# Altium PCB BYS_PCB1.PcbDoc
Units mm, origin at the board's own origin, x right, y up, seen from the top; angles counter-clockwise.
Board outline 97 x 73.5 mm, 2 copper layers (Top Layer, Bottom Layer), stack 1.571 mm thick; 34 components, 38 nets, 170 pads, 358 vias.
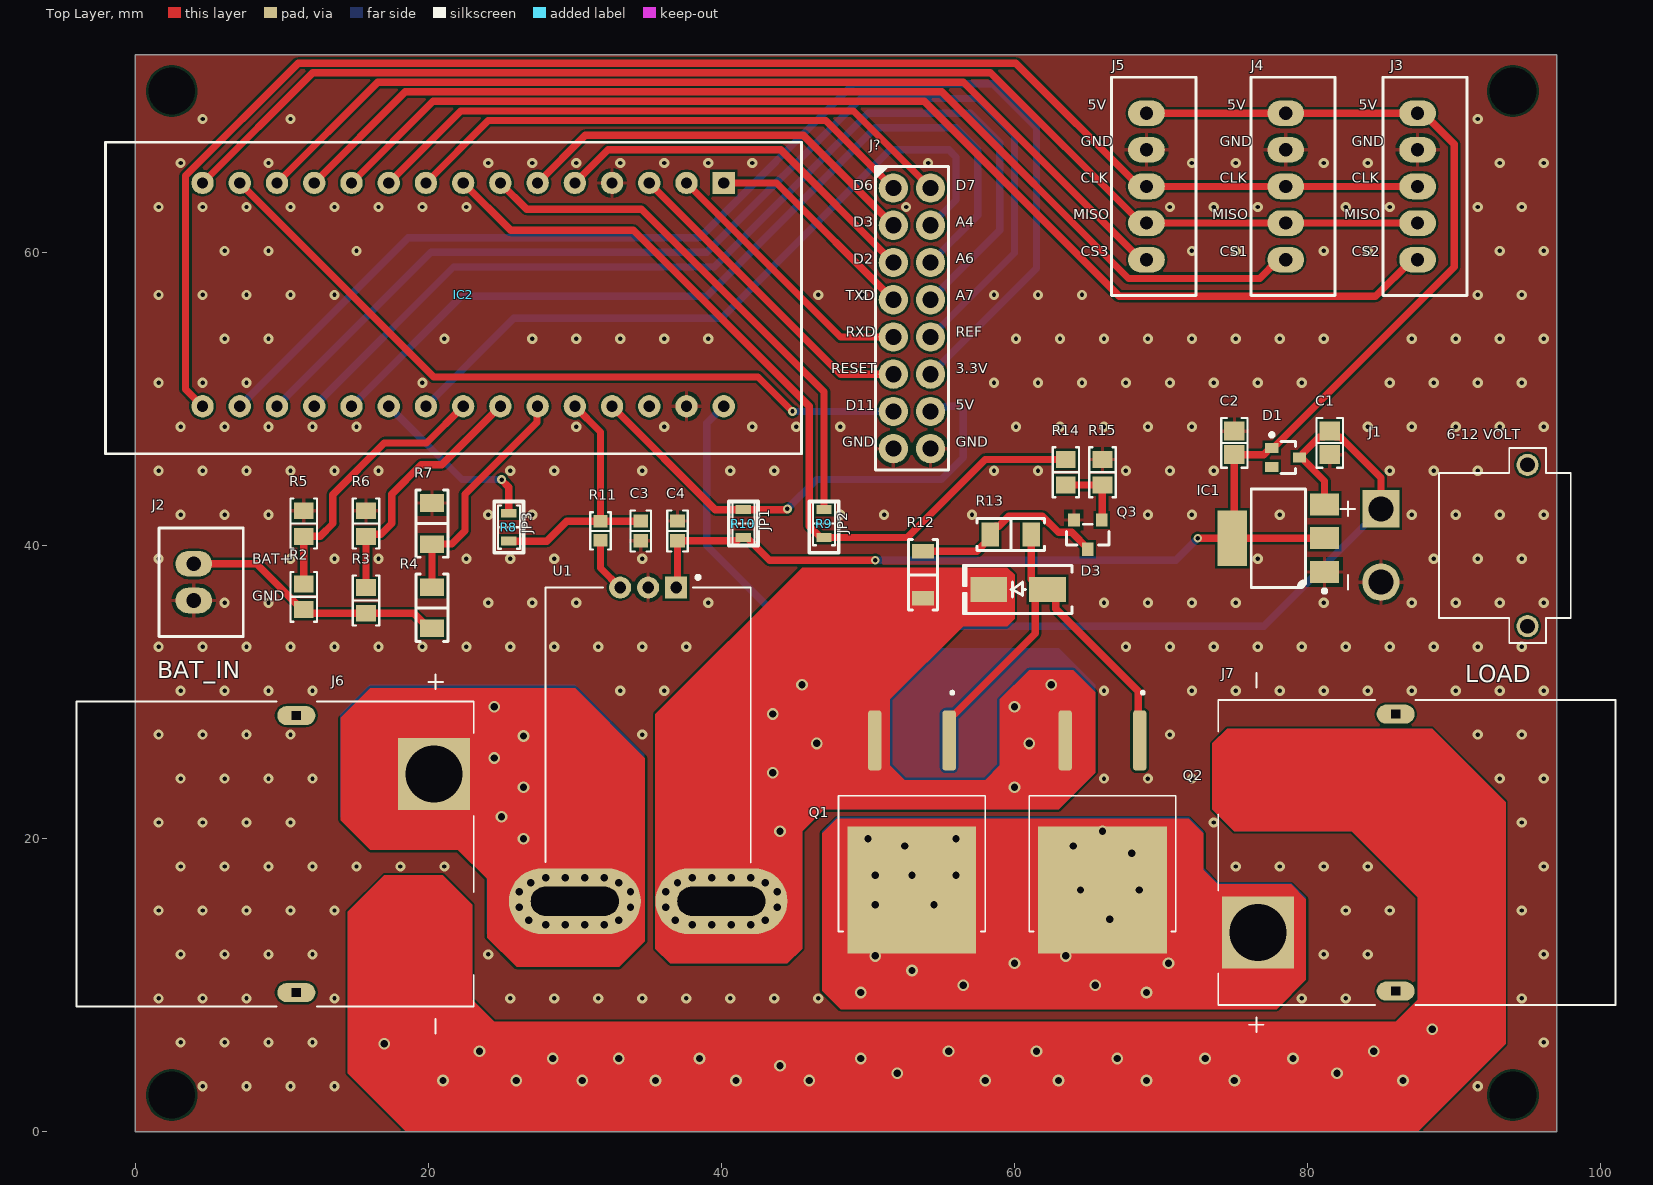
[diagram p0: Top Layer view]
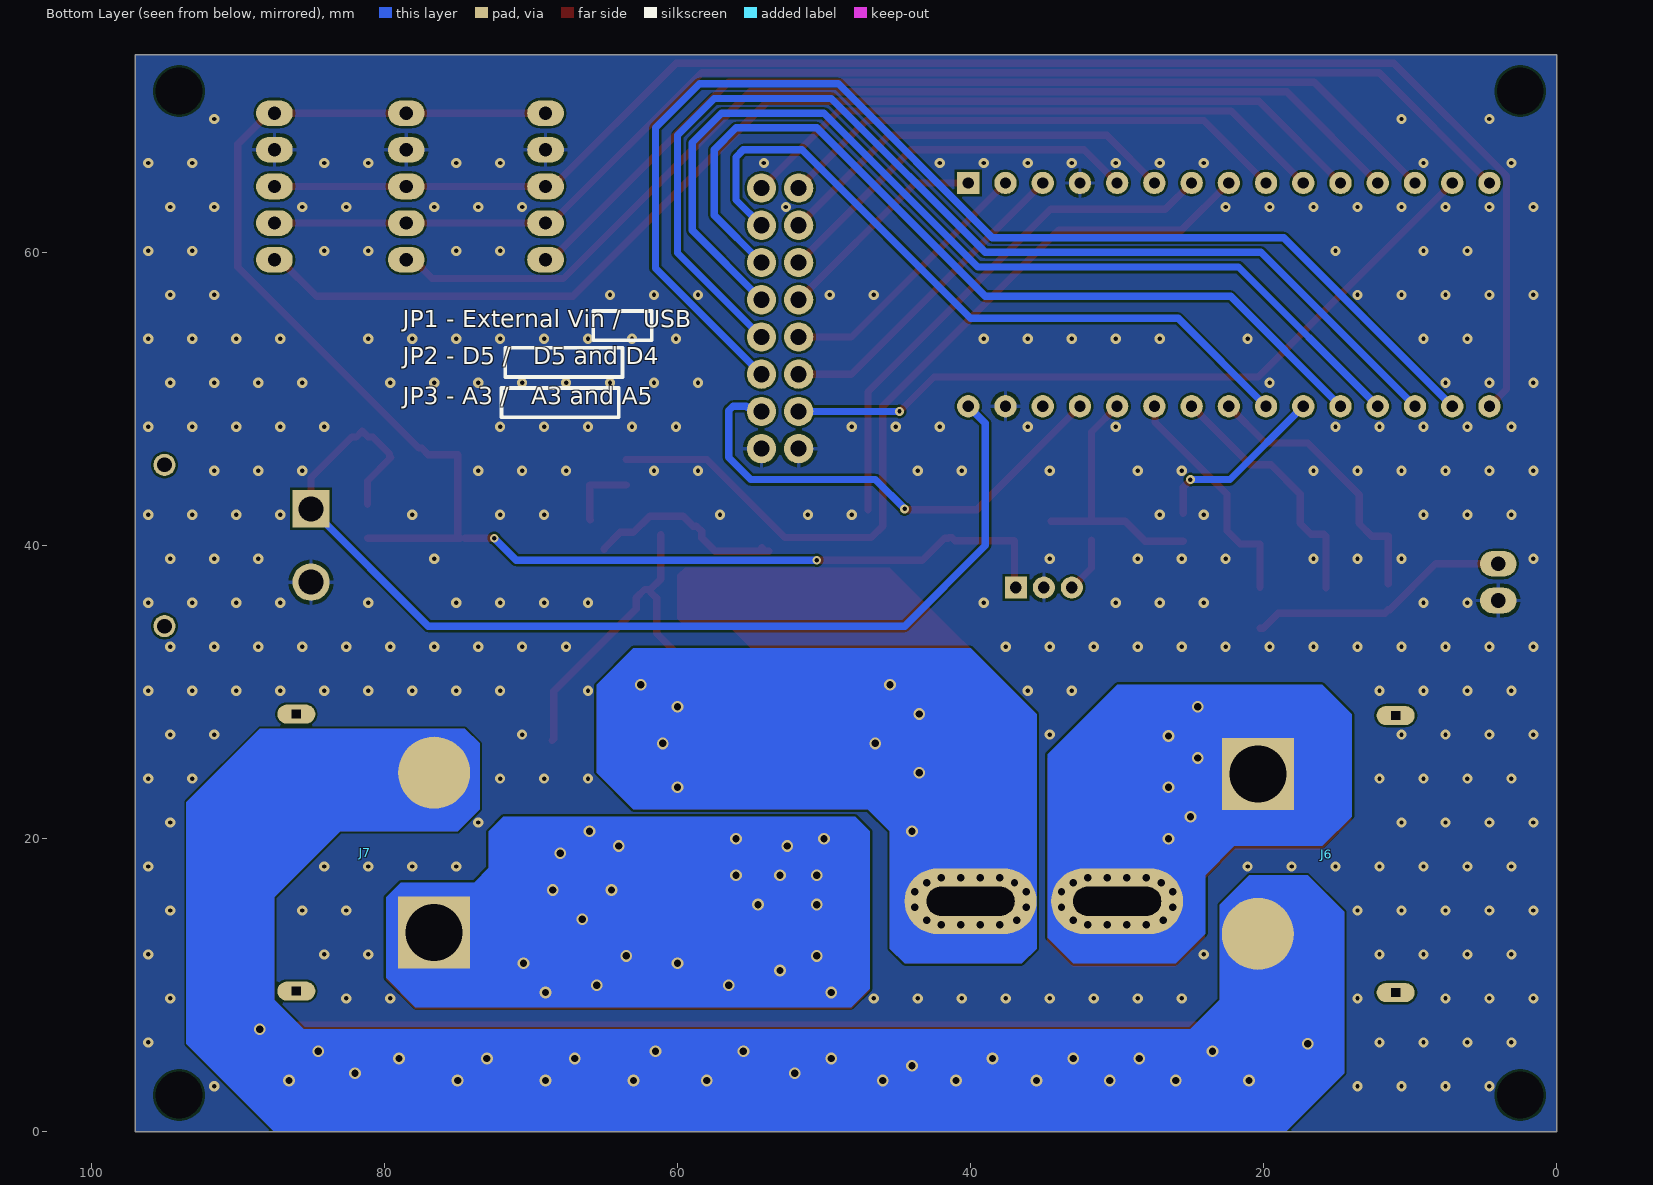
[diagram p1: Bottom Layer view, seen from below]
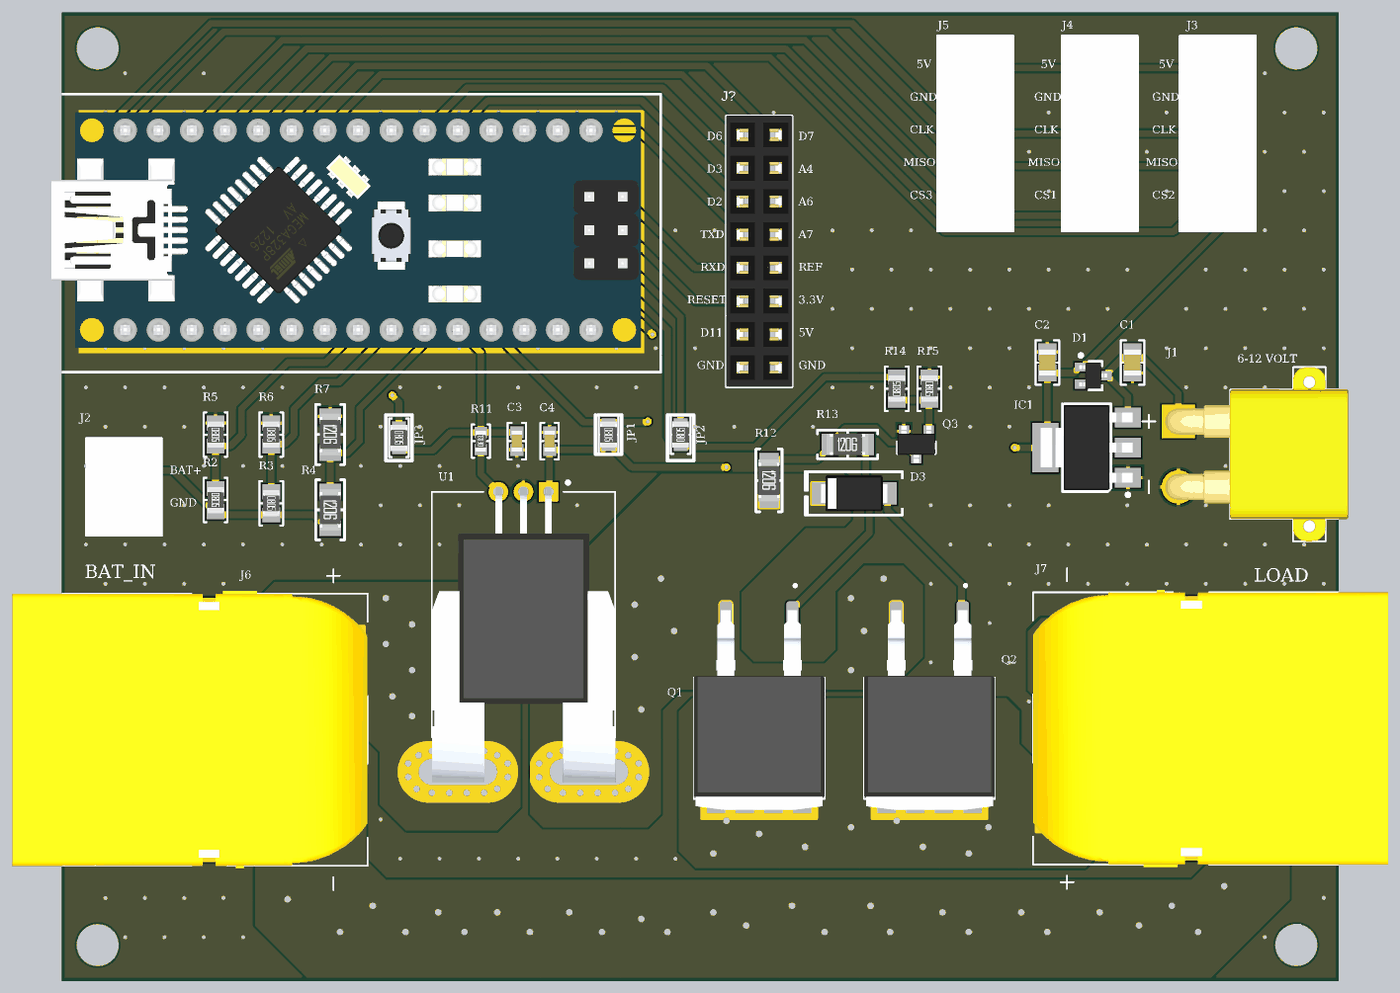
[diagram p2: 3D render of the assembled board from above, using the file's embedded part models]

## Layer stack, top to bottom
Top Solder: solder mask 0.0102, Solder Resist, Dk 3.5
Top Layer: signal copper 0.0356
Dielectric 1: dielectric 1.5, FR-4, Dk 4.8
Bottom Layer: signal copper 0.0356
Bottom Solder: solder mask 0.0102, Solder Resist, Dk 3.5

## Board outline
0,0 0,73.5 97,73.5 97,0

## Design rules (kind name [scope] priority, off if disabled: settings)
Clearance [All] p1: gap=0.152 ignorepadtopadclearanceinfootprint=FALSE
PolygonConnect [All] p1: connectstyle=Relief reliefconductorwidth=0.254 reliefentries=4 polygonreliefangle="90 Angle" airgapwidth=0.254
RoutingVias [All] p1: holewidth=0.3 width=0.6 viastyle="Through Hole" minholewidth=0.3 minwidth=0.4 maxholewidth=1.2 maxwidth=1.2
SolderMaskExpansion [All] p1: expansion=0.102 istentingtop=FALSE
SupplyNets "Schematic Supply Nets_3" [InNet('GND')] p1: voltage=0.000
SupplyNets "Schematic Supply Nets_2" [InNet('BAT_SENSE_+')] p2: voltage=0.000
SupplyNets "Schematic Supply Nets_1" [InNet('+12')] p3: voltage=0.000
SupplyNets "Schematic Supply Nets" [InNet('+5')] p4: voltage=0.000
Width [All] p1: maxlimit=1 minlimit=0.152 preferedwidth=0.5
30 further rules are at their usual default settings.

## Classes and differential pairs
component class PMOS: C3 C4 D3 J6 J7 Q1 Q2 Q3 R11 R12 R13 R14 R15 U1
component class Main: C1 C2 D1 IC1 IC2 J1 J2 J3 J4 J5 J? R2 R3 R4 R5 R6 R7 R8 R9 R10

## Components (designator, comment, footprint, x,y, rotation, side; value= is the part's Value field where it differs from the comment)
C1 "10µF" "CAP 0805_2012" 81.5,47 r90 top
C2 "22µF" "CAP 0805_2012" 75,47 r270 top
C3 "2.2µF" "CAP 0603_1608" 34.5,41 r270 top
C4 "0.1µF" "CAP 0603_1608" 37,41 r270 top
D1 "BAS20W-7-F" "DIODES SOT-323-3" 78.5,46 r0 top
D3 "SMAZ15-TP" "DO214AC SMA" 60.25,37 r180 top
IC1 "LD1117S50TR" "ST SOT-223" 78,40.5 r180 top
IC2 "ArduinoNano" ArduinoNano_3D 44.224,66.264 r180 top
J1 "XT30_PW-M" XT30_PW-M 95,40 r270 top
J2 "B2B-XH-A(LF)(SN)" "JST XH B2B-XH-A" 4,37.5 r90 top
J3 "B5B-XH-A(LF)(SN)" "JST XH B5B-XH-A" 87.5,64.5 r90 top
J4 "B5B-XH-A(LF)(SN)" "JST XH B5B-XH-A" 78.5,64.5 r90 top
J5 "B5B-XH-A(LF)(SN)" "JST XH B5B-XH-A" 69,64.5 r90 top
J6 "SMT XT90 CONNECTOR" XT90_PW-M 11,18.95 r270 top
J7 "SMT XT90 CONNECTOR" XT90_PW-M 86,19.05 r90 top
J? "M20-7830842" "HARWIN M20-7830845" 53,55.5 r0 top
Q1 "PMOS" TO-263-3-2 53,20.46 r270 top
Q2 "PMOS" TO-263-3-2 66,20.46 r270 top
Q3 "ZXTN25060BFHTA" "DIODES SOT-23-3" 65,40.75 r270 top
R2 "100 kOhms" "RES 0805_2012" 11.5,36.5 r270 top
R3 "0 Ohms" "RES 0805_2012" 15.75,36.25 r270 top
R4 "0 Ohms" "RES 1206_3216" 20.25,35.75 r270 top
R5 "10 kOhms" "RES 0805_2012" 11.5,41.5 r270 top
R6 "0 Ohms" "RES 0805_2012" 15.75,41.5 r270 top
R7 "0 Ohms" "RES 1206_3216" 20.25,41.5 r270 top
R8 "0 Ohms" "YAGEO RES RK73 RS73 SG73 0805_2012" 25.5,41.25 r270 top
R9 "0 Ohms" "YAGEO RES RK73 RS73 SG73 0805_2012" 47,41.5 r90 top
R10 "0 Ohms" "YAGEO RES RK73 RS73 SG73 0805_2012" 41.5,41.5 r270 top
R11 "10 kOhms" "RES 0603_1608" 31.75,41 r90 top
R12 "22 kOhms" "YAGEO RES 1206_3216" 53.75,38 r270 top
R13 "100 Ohms" "RES 1206_3216" 59.75,40.75 r0 top
R14 "10 kOhms" "RES 0805_2012" 63.5,45 r90 top
R15 "10 kOhms" "RES 0805_2012" 66,45 r270 top
U1 "ACS758" ACS758 35,37.13 r180 top

## Footprints (in the part's own frame and the unit in brackets; to place one, negate y for a bottom-side part, rotate by r counter-clockwise, add the part's x,y. Pads: shape width x height; smd on the part's side, far side on the other; paste and mask are expansions set on the pad)
ACS758 [mm]
  rect 1.5x1.5 / inner round 1.5 / far side rect 1.5x1.5 hole 0.8: 1(-1.91,0)
  round 1.5 hole 0.8: 2(0,0) 3(1.91,0)
  oval 9x4.5 hole 2 slot 6 at 0 deg: 4(5,21.4) 5(-5,21.4)
  round 0.8 hole 0.5: 4_1(3,19.8) 4_2(4.33,19.8) 4_3(5.66,19.8) 4_4(6.99,19.8) 4_5(8,20.13) 4_6(8.8,20.75) 4_7(8.8,21.8) 4_8(8.15,22.7) 4_9(6.99,23) 4_10(5.66,23) 4_11(4.33,23) 4_12(3,23) 4_13(2,22.7) 4_14(1.2,21.8) 4_15(1.2,20.75) 4_16(2,20.13) 5_1(-7,19.8) 5_2(-5.67,19.8) 5_3(-4.34,19.8) 5_4(-3.01,19.8) 5_5(-8,20.13) 5_6(-8.8,20.75) 5_7(-8.8,21.8) 5_8(-8,22.7) 5_9(-7,23) 5_10(-5.67,23) 5_11(-4.34,23) 5_12(-3.01,23) 5_13(-1.85,22.7) 5_14(-1.2,21.8) 5_15(-1.2,20.75) 5_16(-2,20.13)
  silkscreen extent -7,-0.82 7,18.76, body extent -7.02,-0.38 6.98,22.2, height 7.1
ArduinoNano_3D [mil]
  rect 60x60 hole 30: 0(160,60)
  round 60 hole 30: 1(260,60) 2(360,60) 3(460,60) 4(560,60) 5(660,60) 6(760,60) 7(860,60) 8(960,60) 9(1060,60) 10(1160,60) 11(1260,60) 12(1360,60) 13(1460,60) 14(1560,60) 15(1560,660) 16(1460,660) 17(1360,660) 18(1260,660) 19(1160,660) 20(1060,660) 21(960,660) 22(860,660) 23(760,660) 24(660,660) 25(560,660) 26(460,660) 27(360,660) 28(260,660) 29(160,660)
  silkscreen extent -49,-49 1821,787, body extent 10,6 1781,714, height 496
"CAP 0603_1608" [mm] "Chip Capacitor, 2-Leads, Body 1.60x0.80mm, IPC Medium Density"
  rect 0.9x1 smd: 1(-0.675,0) 2(0.675,0)
  silkscreen extent -1.4,-0.7 1.4,0.7, body extent -0.8,-0.41 0.8,0.41, height 0.82
"CAP 0805_2012" [mm] "Chip Capacitor, 2-Leads, Body 2.00x1.20mm, IPC Medium Density"
  rect 1.3x1.4 smd: 1(-0.8,0) 2(0.8,0)
  silkscreen extent -1.7,-0.9 1.7,0.9, body extent -1,-0.64 1,0.64, height 1.26
"DIODES SOT-23-3" [mm] "SOT23, 3-Leads, Body 2.90x2.40mm, Pitch 0.95mm, IPC Medium Density"
  rect 0.9x0.8 smd: 1(-1,0.95) 2(-1,-0.95) 3(1,0)
  silkscreen extent -0.7,-1.45 0.7,1.45, body extent -1.41,-1.45 1.41,1.45, height 1.5
"DIODES SOT-323-3" [mm] "SOT323, 3-Leads, Body 2.00x2.10mm, Pitch 0.65mm, IPC Medium Density"
  rect 0.9x0.7 smd: 1(-0.95,0.65) 2(0.95,0) 3(-0.95,-0.65)
  silkscreen extent -1.07,-1.1 0.67,1.67, body extent -1.06,-1 1.06,1, height 1
"DO214AC SMA" [mm] "Molded Diode, 2-Leads, Body 4.30x2.60mm, IPC Medium Density"
  rect 2.5x1.7 smd: 1(-2,0) 2(2,0)
  silkscreen extent -3.68,-1.65 3.75,1.65, body extent -2.6,-1.37 2.6,1.37, height 2.4
"HARWIN M20-7830845" [mm] "2.54mm DIL PC TAIL PIN HEADER ASSEMBLY"
  round 2 hole 1.1: 1(-1.27,8.89) 2(-1.27,6.35) 3(-1.27,3.81) 4(-1.27,1.27) 5(-1.27,-1.27) 6(-1.27,-3.81) 7(-1.27,-6.35) 8(-1.27,-8.89) 9(1.27,-8.89) 10(1.27,-6.35) 11(1.27,-3.81) 12(1.27,-1.27) 13(1.27,1.27) 14(1.27,3.81) 15(1.27,6.35) 16(1.27,8.89)
  silkscreen extent -2.5,-10.36 2.5,10.35, body extent -2.52,-10.36 2.52,10.36, height 8.5
"JST XH B2B-XH-A" [mm]
  oval 1.75x2.5 hole 1: 1(-1.25,0) 2(1.25,0)
  silkscreen extent -3.7,-3.38 3.7,2.38, body extent -3.7,-3.38 3.7,2.38, height 7
"JST XH B5B-XH-A" [mm]
  oval 1.75x2.5 hole 0.9: 1(-5,0) 2(-2.5,0) 3(0,0) 4(2.5,0) 5(5,0)
  silkscreen extent -7.45,-3.38 7.45,2.38, body extent -7.45,-3.38 7.45,2.38, height 7
"RES 0603_1608" [mm] "Chip Resistor, 2-Leads, Body 1.60x0.80mm, IPC Medium Density"
  rect 0.85x0.95 smd: 1(-0.65,0) 2(0.65,0)
  silkscreen extent -1.27,-0.7 1.27,0.7, body extent -0.8,-0.4 0.8,0.4, height 0.45
"RES 0805_2012" [mm] "Chip Resistor, 2-Leads, Body 2.00x1.25mm, IPC Medium Density"
  rect 1.15x1.35 smd: 1(-0.875,0) 2(0.875,0)
  silkscreen extent -1.7,-0.9 1.7,0.9, body extent -1,-0.62 1,0.63, height 0.6
"RES 1206_3216" [mm] "Chip Resistor, 2-Leads, Body 3.13x1.55mm, IPC Medium Density"
  rect 1.2x1.65 smd: 1(-1.4,0) 2(1.4,0)
  silkscreen extent -2.3,-1.1 2.3,1.1, body extent -1.6,-0.8 1.6,0.8, height 0.6
"ST SOT-223" [mm] "SOT223, 4-Leads, Body 6.50x7.00mm (avg), Pitch 2.30mm, IPC Medium Density"
  rect 2x1.5 smd: 1(-3.15,2.3) 2(-3.15,0) 3(-3.15,-2.3)
  rect 2x3.8 smd: 4(3.15,0)
  silkscreen extent -3.27,-3.35 1.85,3.72, body extent -3.52,-3.25 3.5,3.25, height 1.8
TO-263-3-2 [mm]
  rrect50% 4.12x0.94 smd: 1(-6.24,2.54) 2(-6.24,-2.54)
  rect 8.68x8.77 smd paste-5: 3(3.96,0)
  silkscreen extent -9.6,-5 6.79,5, body extent -7.63,-5 7.63,5, height 4.5
XT30_PW-M [mm]
  round 2.55 hole 1.7: N(2.5,-10)
  rect 2.55x2.55 / inner round 2.55 / far side rect 2.55x2.55 hole 1.7: P(-2.5,-10)
  round 1.508 hole 1: S1(5.5,0) S2(-5.5,0)
  silkscreen extent -6.65,-12.75 6.65,2.95, body extent -6.65,-11 6.65,2.95, height 5
XT90_PW-M [mm]
  round 4.916 smd far side: N(5.45,9.4)
  rect 4.916x4.916 / inner round 4.916 / far side rect 4.916x4.916 hole 3.9: P(-5.45,9.4)
  oval 1.3x2.6 hole 0.6 square: S1(-9.45,0) S2(9.45,0)
  silkscreen extent -12.25,-15 12.25,12.1, body extent -10.6,-15 10.6,12.1, height 10.3
"YAGEO RES 1206_3216" [mm] "Chip Resistor, 2-Leads, Body 3.13x1.55mm"
  rect 1x1.5 smd: 1(-1.6,0) 2(1.6,0)
  silkscreen extent -2.4,-1 2.4,1, body extent -1.6,-0.8 1.6,0.8, height 0.6
"YAGEO RES RK73 RS73 SG73 0805_2012" [mm] "Chip Resistor, 2-Leads, Body 2.00x1.25mm"
  rect 0.6x1.05 smd: 1(-0.95,0) 2(0.95,0)
  silkscreen extent -1.48,-0.75 1.48,0.75, body extent -1,-0.62 1,0.63, height 0.6

## Part data
C1: library part 08053D106KAT2A, "CAP CER 10UF 25V X5R 0805", Device Package="0805 (2012 Metric)", LCSC Part Number=C15850, manufacturer="AVX Corporation", Operating Temperature="-55°C ~ 85°C", Supplier Part Number 1=478-7436-1-ND, Temperature Coefficient=X5R, Tolerance=±10%, Voltage - Rated=25V, Applications="General Purpose", Capacitance=10µF, componentlink1description=Datasheet, componentlink1url=http://datasheets.avx.com/cx5r.pdf, componentlink2description="DigiKey Link", componentlink2url=http://digikey.com/product-detail/en/avx-corporation/08053D106KAT2A/478-7436-1-ND/3660337, lastupdated="2.09.2020 01:04:14", Lifecycle Status=Active, Minimum Order=1, Mounting Type="Surface Mount, MLCC", Package / Case="0805 (2012 Metric)", packaging=TapeAndReel, Part Number=08053D106KAT2A, Part Status=Active, partid=15850, price=0.13, series=-, Size / Dimension="0.079\" L x 0.049\" W (2.00mm x 1.25mm)", Supplier 1=DigiKey, Thickness (Max)="0.051\" (1.30mm)"
C2: library part 0805ZD226MAT2A, "CAP CER 22UF 10V X5R 0805", Device Package="0805 (2012 Metric)", LCSC Parrt Number=C45783, manufacturer="AVX Corporation", Operating Temperature="-55°C ~ 85°C", Supplier Part Number 1=478-7966-1-ND, Temperature Coefficient=X5R, Tolerance=±20%, Voltage - Rated=10V, Applications="General Purpose", Capacitance=22µF, componentlink1description=Datasheet, componentlink1url=http://datasheets.avx.com/cx5r.pdf, componentlink2description="DigiKey Link", componentlink2url=http://digikey.com/product-detail/en/avx-corporation/0805ZD226MAT2A/478-7966-1-ND/3881589, lastupdated="2.09.2020 01:04:32", Lifecycle Status=Active, Minimum Order=1, Mounting Type="Surface Mount, MLCC", Package / Case="0805 (2012 Metric)", packaging=TapeAndReel, Part Number=0805ZD226MAT2A, Part Status=Active, partid=7750, price=0.10, series=-, Size / Dimension="0.079\" L x 0.049\" W (2.00mm x 1.25mm)", Supplier 1=DigiKey, Thickness (Max)="0.060\" (1.52mm)"
C3: library part 0603YD225KAT4A, "CAP CER 2.2UF 16V X5R 0603", Device Package="0603 (1608 Metric)", JLCBPCB Part Number=C1607, manufacturer="AVX Corporation", Operating Temperature="-55°C ~ 85°C", Supplier Part Number 1=478-12464-1-ND, Temperature Coefficient=X5R, Tolerance=±10%, Voltage - Rated=16V, Applications="General Purpose", Capacitance=2.2µF, componentlink1description=Datasheet, componentlink1url=http://datasheets.avx.com/cx5r.pdf, componentlink2description="DigiKey Link", componentlink2url=http://digikey.com/product-detail/en/avx-corporation/0603YD225KAT4A/478-12464-1-ND/9749316, lastupdated="2.09.2020 01:03:21", Lifecycle Status=Active, Minimum Order=1, Mounting Type="Surface Mount, MLCC", Package / Case="0603 (1608 Metric)", packaging=TapeAndReel, Part Number=0603YD225KAT4A, Part Status=Active, partid=10384, price=0.19, series=-, Size / Dimension="0.063\" L x 0.032\" W (1.60mm x 0.81mm)", Supplier 1=DigiKey, Thickness (Max)="0.037\" (0.94mm)"
C4: library part 06035G104ZAT2A, "CAP CER 0.1UF 50V Y5V 0603", Device Package="0603 (1608 Metric)", JLCPCB Part Number=C1590, manufacturer="AVX Corporation", Operating Temperature="-30°C ~ 85°C", Supplier Part Number 1=478-3724-1-ND, Temperature Coefficient="Y5V (F)", Tolerance="-20%, +80%", Voltage - Rated=50V, Applications="General Purpose", Capacitance=0.1µF, componentlink1description=Datasheet, componentlink1url=http://datasheets.avx.com/Y5V.pdf, componentlink2description="DigiKey Link", componentlink2url=http://digikey.com/product-detail/en/avx-corporation/06035G104ZAT2A/478-3724-1-ND/1116422, lastupdated="2.09.2020 01:03:30", Lifecycle Status=Active, Minimum Order=1, Mounting Type="Surface Mount, MLCC", Package / Case="0603 (1608 Metric)", packaging=TapeAndReel, Part Number=06035G104ZAT2A, Part Status=Active, partid=5562, price=0.01, series=-, Size / Dimension="0.063\" L x 0.032\" W (1.60mm x 0.81mm)", Supplier 1=DigiKey, Thickness (Max)="0.035\" (0.90mm)"
D1: "DIODE GEN PURP 150V 200MA SOT323", Capacitance @ Vr, F="5pF @ 0V, 1MHz", Current - Average Rectified (Io)=200mA, Current - Reverse Leakage @ Vr="100 nA @ 150 V", JLCPCB Part Number=C47546, manufacturer="Diodes Incorporated", Operating Temperature - Junction="-65°C ~ 150°C", Package / Case="SC-70, SOT-323", Supplier Device Package=SOT-323, Supplier Part Number 1=BAS20W-FDICT-ND, Voltage - DC Reverse (Vr) (Max)="150 V", Voltage - Forward (Vf) (Max) @ If="1.25 V @ 200 mA", componentlink1description=Datasheet, componentlink1url=https://www.diodes.com/assets/Datasheets/Ds30118.pdf, componentlink2description="DigiKey Link", componentlink2url=https://www.digikey.com/en/products/detail/diodes-incorporated/BAS20W-7-F/815029, Diode Type=Standard, lastupdated="3.06.2024 20:01:39", Lifecycle Status=Active, Minimum Order=1, Mounting Type="Surface Mount", packaging=TapeAndReel, Part Number=BAS20W-7-F, Part Status=Active, partid=10, price=0.03, Reverse Recovery Time (trr)="50 ns", series=-, Speed="Small Signal =< 200mA (Io), Any Speed", Supplier 1=DigiKey
D3: "DIODE ZENER 15V 1W DO214AC", Current - Reverse Leakage @ Vr="1 µA @ 11.4 V", manufacturer="Micro Commercial Co", Operating Temperature="-65°C ~ 150°C", Package / Case="DO-214AC, SMA", Power - Max="1 W", Supplier Device Package="DO-214AC (SMAJ)", Supplier Part Number 1=SMAZ15-TPMSCT-ND, Tolerance=±5%, Voltage - Forward (Vf) (Max) @ If="1.2 V @ 200 mA", Voltage - Zener (Nom) (Vz)="15 V", componentlink1description=Datasheet, componentlink1url=https://www.mccsemi.com/pdf/Products/SMAZ5V1%20-%20SMAZ39(DO-214AC).pdf, componentlink2description="DigiKey Link", componentlink2url=https://www.digikey.com/en/products/detail/micro-commercial-co/SMAZ15-TP/1793256, lastupdated="3.06.2024 19:55:30", Lifecycle Status=Active, Minimum Order=1, Mounting Type="Surface Mount", packaging=TapeAndReel, Part Number=SMAZ15-TP, Part Status=Active, partid=1156, price=0.05, series=-, Supplier 1=DigiKey, Impedance (Max) (Zzt)="10 Ohms"
IC1: "IC REG LINEAR 5V 800MA SOT223", Current - Output=800mA, Current - Quiescent (Iq)="10 mA", LCSC Part Number=C347223, manufacturer=STMicroelectronics, Operating Temperature="0°C ~ 125°C", Package / Case="TO-261-4, TO-261AA", Supplier Device Package=SOT-223, Supplier Part Number 1=497-6447-1-ND, Voltage - Output (Min/Fixed)=5V, Voltage - Input (Max)=15V, Voltage Dropout (Max)="1.2V @ 800mA", componentlink1description=Datasheet, componentlink1url=http://www.st.com/content/ccc/resource/technical/document/datasheet/99/3b/7d/91/91/51/4b/be/CD00000544.pdf/files/CD00000544.pdf/jcr:content/translations/en.CD00000544.pdf, componentlink2description="DigiKey Link", componentlink2url=https://www.digikey.com/en/products/detail/stmicroelectronics/LD1117S50TR/1038360, lastupdated="3.06.2024 20:14:20", Lifecycle Status=Active, Minimum Order=1, Mounting Type="Surface Mount", Number of Regulators=1, Output Configuration=Positive, Output Type=Fixed, packaging=TapeAndReel, Part Number=LD1117S50TR, Part Status=Active, price=0.13, Protection Features="Over Current, Over Temperature", PSRR="75dB (120Hz)", series=-, Supplier 1=DigiKey
IC2: "ArduinoNano 3D"
J1: JLCPCB Part Number=C431092
J2: "CONN HEADER VERT 2POS 2.5MM", Current Rating (Amps)=3A, manufacturer="JST Sales America Inc.", Material Flammability Rating="UL94 V-0", Operating Temperature="-25°C ~ 85°C", Supplier Part Number 1=455-2247-ND, Voltage Rating=250V, Insulation Color=Natural, componentlink1description=Datasheet, componentlink1url=http://www.jst-mfg.com/product/pdf/eng/eXH.pdf, componentlink2description="DigiKey Link", componentlink2url=http://digikey.com/product-detail/en/jst-sales-america-inc/B2B-XH-A-LF-SN/455-2247-ND/1651045, Connector Type=Header, Contact Finish - Mating=Tin, Contact Finish - Post=Tin, Contact Length - Post="0.134\" (3.40mm)", Contact Material=Brass, Contact Shape=Square, Contact Type="Male Pin", Fastening Type="Detent Lock", lastupdated="12.01.2020 23:46:08", Lifecycle Status=Active, Minimum Order=1, Mounting Type="Through Hole", Number of Positions=2, Number of Positions Loaded=All, Number of Rows=1, packaging=Bulk, Part Number=B2B-XH-A(LF)(SN), Part Status=Active, partid=67, Pitch - Mating="0.098\" (2.50mm)", price=0.15, series=XH, Shrouding="Shrouded - 4 Wall", Style="Board to Cable/Wire", Supplier 1=DigiKey, Termination="Press-Fit, Solder", Insulation Height="0.276\" (7.00mm)", Insulation Material="Polyamide (PA66), Nylon 6/6"
J3 J4 J5: "CONN HEADER VERT 5POS 2.5MM", Current Rating (Amps)=3A, manufacturer="JST Sales America Inc.", Material Flammability Rating="UL94 V-0", Operating Temperature="-25°C ~ 85°C", Supplier Part Number 1=455-2270-ND, Voltage Rating=250V, Insulation Color=Natural, componentlink1description=Datasheet, componentlink1url=http://www.jst-mfg.com/product/pdf/eng/eXH.pdf, componentlink2description="DigiKey Link", componentlink2url=http://digikey.com/product-detail/en/jst-sales-america-inc/B5B-XH-A-LF-SN/455-2270-ND/1530483, Connector Type=Header, Contact Finish - Mating=Tin, Contact Finish - Post=Tin, Contact Length - Post="0.134\" (3.40mm)", Contact Material=Brass, Contact Shape=Square, Contact Type="Male Pin", Fastening Type="Detent Lock", lastupdated="12.01.2020 23:46:46", Lifecycle Status=Active, Minimum Order=1, Mounting Type="Through Hole", Number of Positions=5, Number of Positions Loaded=All, Number of Rows=1, packaging=Bulk, Part Number=B5B-XH-A(LF)(SN), Part Status=Active, partid=70, Pitch - Mating="0.098\" (2.50mm)", price=0.25, series=XH, Shrouding="Shrouded - 4 Wall", Style="Board to Cable/Wire", Supplier 1=DigiKey, Termination="Press-Fit, Solder", Insulation Height="0.276\" (7.00mm)", Insulation Material="Polyamide (PA66), Nylon 6/6"
J6 J7: library part XT90_PW-M, JLCPCB Part Number=C3040689
J?: "CONN RCPT 16POS 0.1 GOLD PCB", Current Rating (Amps)=3A, manufacturer="Harwin Inc.", Material Flammability Rating="UL94 V-0", Operating Temperature="-40°C ~ 105°C", Supplier Part Number 1=952-1819-ND, Insulation Color=Black, componentlink1description=Datasheet, componentlink1url=https://cdn.harwin.com/pdfs/Harwin_PC_Connectors_M20.pdf, componentlink2description="DigiKey Link", componentlink2url=https://www.digikey.com/en/products/detail/harwin-inc/M20-7830842/3727786, Connector Type=Receptacle, Contact Finish - Mating=Gold, Contact Finish - Post=Tin, Contact Finish Thickness - Mating=Flash, Contact Length - Post="0.118\" (3.00mm)", Contact Type="Female Socket", Fastening Type=Push-Pull, lastupdated="21.09.2022 19:06:04", Lifecycle Status=Active, Mated Stacking Heights="11.04mm, 12.63mm", Minimum Order=1, Mounting Type="Through Hole", Number of Positions=16, Number of Positions Loaded=All, Number of Rows=2, packaging=Tube, Part Number=M20-7830842, Part Status=Active, Pitch - Mating="0.100\" (2.54mm)", price=1.17, Row Spacing - Mating="0.100\" (2.54mm)", series=M20, Style="Board to Board or Cable", Supplier 1=DigiKey, Termination=Solder, Insulation Height="0.335\" (8.51mm)"
Q3: "TRANS NPN 60V 3.5A SOT23-3", Current - Collector (Ic) (Max)="3.5 A", Current - Collector Cutoff (Max)="50nA (ICBO)", DC Current Gain (hFE) (Min) @ Ic, Vce="100 @ 10mA, 2V", Frequency - Transition=185MHz, manufacturer="Diodes Incorporated", Operating Temperature="-55°C ~ 150°C (TJ)", Package / Case="TO-236-3, SC-59, SOT-23-3", Power - Max="1.25 W", Supplier Device Package=SOT-23-3, Supplier Part Number 1=ZXTN25060BFHCT-ND, Voltage - Collector Emitter Breakdown (Max)="60 V", componentlink1description=Datasheet, componentlink1url=https://www.diodes.com/assets/Datasheets/ZXTN25060BFH.pdf, componentlink2description="DigiKey Link", componentlink2url=https://www.digikey.com/en/products/detail/diodes-incorporated/ZXTN25060BFHTA/1043597, lastupdated="3.06.2024 20:24:10", Lifecycle Status=Active, Minimum Order=1, Mounting Type="Surface Mount", packaging=TapeAndReel, Part Number=ZXTN25060BFHTA, Part Status=Active, partid=49, price=0.19, series=-, Supplier 1=DigiKey, Transistor Type=NPN, Vce Saturation (Max) @ Ib, Ic="175mV @ 350mA, 3.5A"
R2: library part TNPW0805100KFEEA, "RES 100K OHM 1% 1/8W 0805", Device Package="0805 (2012 Metric)", JLCPCB Part Number=C25611, manufacturer="Vishay Dale", Operating Temperature="-55°C ~ 155°C", Power (Watts)="0.125W, 1/8W", Ratings=AEC-Q200, Supplier Device Package=0805, Supplier Part Number 1=541-3912-1-ND, Temperature Coefficient=±25ppm/°C, Tolerance=±1%, componentlink1description=Datasheet, componentlink1url=http://www.vishay.com/docs/28758/tnpw_e3.pdf, componentlink2description="DigiKey Link", componentlink2url=https://www.digikey.com/en/products/detail/vishay-dale/TNPW0805100KFEEA/7354887, Composition="Thin Film", Features="Anti-Sulfur, Automotive AEC-Q200, Moisture Resistant", Height - Seated (Max)="0.022\" (0.55mm)", lastupdated="8.02.2024 21:02:09", Lifecycle Status=Active, Minimum Order=1, Number of Terminations=2, Package / Case="0805 (2012 Metric)", packaging=TapeAndReel, Part Number=TNPW0805100KFEEA, Part Status=Active, partid=34552, price=0.06, Resistance="100 kOhms", series="TNPW e3", Size / Dimension="0.079\" L x 0.049\" W (2.00mm x 1.25mm)", Supplier 1=DigiKey
R3 R6: library part "WR08X000 PTL", "RES 0 OHM JUMPER 1/8W 0805", Device Package="0805 (2012 Metric)", manufacturer="Walsin Technology Corporation", Operating Temperature="-55°C ~ 155°C", Power (Watts)="0.125W, 1/8W", Supplier Device Package=0805, Supplier Part Number 1=1292-WR08X000PTLCT-ND, Tolerance=Jumper, componentlink1description=Datasheet, componentlink1url=https://www.passivecomponent.com/wp-content/uploads/chipR/ASC_WR.pdf, componentlink2description="DigiKey Link", componentlink2url=https://www.digikey.com/en/products/detail/walsin-technology-corporation/WR08X000-PTL/13240889, Composition="Thick Film", Height - Seated (Max)="0.026\" (0.65mm)", lastupdated="8.02.2024 21:00:31", Lifecycle Status=Active, Minimum Order=1, Number of Terminations=2, Package / Case="0805 (2012 Metric)", packaging=CutTape, Part Number="WR08X000 PTL", Part Status=Active, partid=60782, price=0.01, Resistance="0 Ohms", series=WR, Size / Dimension="0.079\" L x 0.049\" W (2.00mm x 1.25mm)", Supplier 1=DigiKey
R4 R7: library part CRG1206ZR, "RES SMD 0 OHM JUMPER 1/4W 1206", Device Package="1206 (3216 Metric)", manufacturer="TE Connectivity Passive Product", Operating Temperature="-55°C ~ 155°C", Power (Watts)="0.25W, 1/4W", Supplier Device Package=1206, Supplier Part Number 1=A106079CT-ND, Tolerance=Jumper, componentlink1description=Datasheet, componentlink1url=https://www.te.com/commerce/DocumentDelivery/DDEController?Action=srchrtrv&DocNm=1773204&DocType=DS&DocLang=English, componentlink2description="DigiKey Link", componentlink2url=https://www.digikey.com/en/products/detail/te-connectivity-passive-product/CRG1206ZR/2055692, Composition="Thick Film", Height - Seated (Max)="0.026\" (0.65mm)", lastupdated="9.02.2024 20:54:45", Lifecycle Status=Active, Minimum Order=1, Number of Terminations=2, Package / Case="1206 (3216 Metric)", packaging=TapeAndReel, Part Number=CRG1206ZR, Part Status=Active, partid=26975, price=0.01, Resistance="0 Ohms", series="CRG, Neohm", Size / Dimension="0.122\" L x 0.061\" W (3.10mm x 1.55mm)", Supplier 1=DigiKey
R5 R14 R15: library part Y162410K0000T9R, "RES SMD 10K OHM 0.01% 1/5W 0805", Device Package="0805 (2012 Metric)", JLCPCB Part Number=C17414, manufacturer="Vishay Foil Resistors (Division of Vishay Precision Group)", Operating Temperature="-55°C ~ 150°C", Power (Watts)="0.2W, 1/5W", Supplier Device Package=0805, Supplier Part Number 1=Y1624-10KCT-ND, Temperature Coefficient=±0.2ppm/°C, Tolerance=±0.01%, componentlink1description=Datasheet, componentlink1url=http://www.vishaypg.com/docs/63060/VSMP.pdf, componentlink2description="DigiKey Link", componentlink2url=https://www.digikey.com/en/products/detail/vishay-foil-resistors-division-of-vishay-precision-group/Y162410K0000T9R/1888101, Composition="Metal Foil", Features="Moisture Resistant, Non-Inductive", Height - Seated (Max)="0.025\" (0.64mm)", lastupdated="8.02.2024 21:00:56", Lifecycle Status=Active, Minimum Order=1, Number of Terminations=2, Package / Case="0805 (2012 Metric)", packaging=TapeAndReel, Part Number=Y162410K0000T9R, Part Status=Active, partid=48767, price=8.64, Resistance="10 kOhms", series=VSMP, Size / Dimension="0.080\" L x 0.050\" W (2.03mm x 1.27mm)", Supplier 1=DigiKey
R8 R9 R10: library part RK73Z2ATTED, "RESISTOR", Device Package="0805 (2012 Metric)", manufacturer="KOA Speer Electronics, Inc.", Operating Temperature="-55°C ~ 155°C", Ratings=AEC-Q200, Supplier Device Package=0805, Supplier Part Number 1=2019-RK73Z2ATTEDCT-ND, Tolerance=Jumper, componentlink1description=Datasheet, componentlink1url=https://www.koaspeer.com/pdfs/RK73Z.pdf, componentlink2description="DigiKey Link", componentlink2url=https://www.digikey.com/en/products/detail/koa-speer-electronics-inc/RK73Z2ATTED/21679892, Composition="Thick Film", Features="Automotive AEC-Q200", Height - Seated (Max)="0.024\" (0.60mm)", lastupdated="25.07.2024 09:45:07", Lifecycle Status=Active, Minimum Order=1, Number of Terminations=2, Package / Case="0805 (2012 Metric)", packaging=TapeAndReel, Part Number=RK73Z2ATTED, partid=90035, price=0.01, Resistance="0 Ohms", series=RK73Z, Size / Dimension="0.079\" L x 0.049\" W (2.00mm x 1.25mm)", Supplier 1=DigiKey
R11: library part CPF0603B10KE, "RES SMD 10K OHM 0.1% 1/16W 0603", Device Package="0603 (1608 Metric)", JLCPCB Part Number=C15401, manufacturer="TE Connectivity Passive Product", Operating Temperature="-55°C ~ 155°C", Power (Watts)="0.063W, 1/16W", Supplier Device Package=0603, Supplier Part Number 1=A119886CT-ND, Temperature Coefficient=±25ppm/°C, Tolerance=±0.1%, componentlink1description=Datasheet, componentlink1url=https://www.te.com/commerce/DocumentDelivery/DDEController?Action=srchrtrv&DocNm=1773200&DocType=DS&DocLang=English, componentlink2description="DigiKey Link", componentlink2url=https://www.digikey.com/en/products/detail/te-connectivity-passive-product/CPF0603B10KE/2389826, Composition="Thin Film", Height - Seated (Max)="0.022\" (0.55mm)", lastupdated="9.02.2024 20:43:37", Lifecycle Status=Active, Minimum Order=1, Number of Terminations=2, Package / Case="0603 (1608 Metric)", packaging=TapeAndReel, Part Number=CPF0603B10KE, Part Status=Active, partid=4872, price=0.09, Resistance="10 kOhms", series="CPF, Neohm", Size / Dimension="0.061\" L x 0.031\" W (1.55mm x 0.80mm)", Supplier 1=DigiKey
R12: library part RT1206BRD0722KL, "RES SMD 22K OHM 0.1% 1/4W 1206", Device Package="1206 (3216 Metric)", manufacturer=Yageo, Operating Temperature="-55°C ~ 155°C", Power (Watts)="0.25W, 1/4W", Supplier Device Package=1206, Supplier Part Number 1=YAG2027CT-ND, Temperature Coefficient=±25ppm/°C, Tolerance=±0.1%, componentlink1description=Datasheet, componentlink1url=https://www.yageo.com/upload/media/product/productsearch/datasheet/rchip/PYu-RT_1-to-0.01_RoHS_L_11.pdf, componentlink2description="DigiKey Link", componentlink2url=https://www.digikey.com/en/products/detail/yageo/RT1206BRD0722KL/1079646, Composition="Thin Film", Height - Seated (Max)="0.026\" (0.65mm)", lastupdated="25.07.2024 09:21:39", Lifecycle Status=Active, Minimum Order=1, Number of Terminations=2, Package / Case="1206 (3216 Metric)", packaging=TapeAndReel, Part Number=RT1206BRD0722KL, Part Status=Active, partid=26867, price=0.09, Resistance="22 kOhms", series=RT, Size / Dimension="0.122\" L x 0.063\" W (3.10mm x 1.60mm)", Supplier 1=DigiKey
R13: library part RNCP1206FTD100R, "RES 100 OHM 1% 1/2W 1206", Device Package="1206 (3216 Metric)", manufacturer="Stackpole Electronics Inc", Operating Temperature="-55°C ~ 155°C", Power (Watts)="0.5W, 1/2W", Supplier Device Package=1206, Supplier Part Number 1=RNCP1206FTD100RCT-ND, Temperature Coefficient=±100ppm/°C, Tolerance=±1%, componentlink1description=Datasheet, componentlink1url=https://www.seielect.com/catalog/sei-rncp.pdf, componentlink2description="DigiKey Link", componentlink2url=https://www.digikey.com/en/products/detail/stackpole-electronics-inc/RNCP1206FTD100R/2240316, Composition="Thin Film", Features=Anti-Sulfur, Height - Seated (Max)="0.025\" (0.65mm)", lastupdated="9.02.2024 20:54:45", Lifecycle Status=Active, Minimum Order=1, Number of Terminations=2, Package / Case="1206 (3216 Metric)", packaging=TapeAndReel, Part Number=RNCP1206FTD100R, Part Status=Active, partid=26969, price=0.01, Resistance="100 Ohms", series=RNCP, Size / Dimension="0.122\" L x 0.059\" W (3.10mm x 1.50mm)", Supplier 1=DigiKey
U1: "Current Sensor 150A 1 Channel Hall Effect, Open Loop Unidirectional 5-CB Formed Leads, PFF"

## Free pads (board coordinates)
  round 1.4 hole 3.2: 27(2.5,2.5) 27(2.5,71) 27(94,2.5) 27(94,71)

## Via types
v1: diameter 0.7, hole 0.3, Top Layer to Bottom Layer, tented both sides, 288 vias
v2: diameter 0.8, hole 0.5, Top Layer to Bottom Layer, tented both sides, 65 vias
v3: diameter 0.6, hole 0.3, Top Layer to Bottom Layer, 5 vias

## Nets (pads, with @x,y where several pads share a name; then routed paths per layer and width w, separated by ;. In a path a pad name is that pad's centre, name@x,y a point inside that pad or via, vN(x,y) a via of type N, cw(c..) or ccw(c..) an arc to the next point about the centre after c; other vN are vias at no path point)
3.3V: IC2.16 J?.11 | length 84.5
  Bottom Layer w0.5: IC2.16 18.64,61 38.513,61 49.013,71.5 58.5,71.5 61.5,68.5 61.5,58.92 J?.11
5V: IC2.26 J?.10 R10.1 | length 34.1
  Top Layer w0.5: IC2.26 39.59,42.45 44.423,42.45 44.473,42.5 v3(44.5,42.5)
  Bottom Layer w0.5: v3(44.5,42.5) 46.5,44.5 55,44.5 56.5,46 56.5,49.207 56.207,49.5 55.313,49.5 55.25,49.437 54.557,49.437 J?.10
+5: C2.2 C4.2 D1.1 IC1.2 IC1.4 J3.5 J4.5 J5.5 R10.2 U1.1 | length 104.7
  Top Layer w0.5: U1.1 37,37.22 C4.2 41.05,40.325 41.275,40.55 R10.2 41.55,40.5 41.775,40.5 43.275,39 v3(50.5,39) ; J5.5 J4.5 J3.5 87.875,69.5 90,67.375 90,59 77.65,46.65 D1.1 77.45,46.65 77,46.2 C2.2 75,40.65 IC1.4 IC1.2 ; v3(72.5,40.5) IC1.4@74.5,40.5
  Bottom Layer w0.5: v3(50.5,39) 71,39 v3(72.5,40.5)
+12: C1.2 D1.2 IC1.3 IC2.29 J1.P | length 75.2
  Top Layer w0.5: IC1.3 81.15,44.4 79.55,46 79.65,46.1 79.65,46.269 80.781,47.4 81.1,47.4 C1.2 81.9,47.4 82.219,47.4 85,44.619 J1.P
  Bottom Layer w0.5: IC2.29 39,48.34 39,40 44.5,34.5 77,34.5 J1.P
A0: IC2.22 R2.1 R5.2 | length 19
  Top Layer w0.5: R2.1 R5.2 12.625,40.625 13.5,41.5 13.471,41.529 13.471,43.471 17,47 19.88,47 IC2.22
A1: IC2.23 R3.1 R6.2 | length 17.5
  Top Layer w0.5: R3.1 R6.2 15.898,40.773 16.773,40.773 17.5,41.5 17.5,43.5 19.5,45.5 20.92,45.5 IC2.23
A2: IC2.24 R4.1 R7.2 | length 16.1
  Top Layer w0.5: R4.1 R7.2 21.6,40.1 22.5,41 22.5,43.5 27.418,48.418 27.418,49.458 IC2.24
A4: IC2.21 J?.15 | length 49
  Bottom Layer w0.5: IC2.21 25.84,55.5 40,55.5 51.5,67 55.5,67 56,66.5 56,63.58 J?.15
A6: IC2.19 J?.14 | length 60.3
  Bottom Layer w0.5: IC2.19 22.26,57 39,57 50.5,68.5 56,68.5 57.5,67 57.5,62.54 J?.14
A7: IC2.18 J?.13 | length 68.6
  Bottom Layer w0.5: IC2.18 21.72,59 39.5,59 50,69.5 57,69.5 59,67.5 59,61.5 J?.13
BASE_D: IC2.7 R9.1 R14.2 | length 58.1
  Top Layer w0.5: IC2.7 25.62,61.5 34,61.5 46,49.5 46,41.325 46.775,40.55 R9.1 52.675,40.55 58,45.875 R14.2
BAT-: J6.N J7.N
  other v2: 21,3.5 26,3.5 30.5,3.5 35.5,3.5 41,3.5 46,3.5 58,3.5 63,3.5 69,3.5 75,3.5 86.5,3.5 52,4 82,4 44,4.5 28.5,5 33,5 38.5,5 49.5,5 67,5 73,5 79,5 23.5,5.5 55.5,5.5 61.5,5.5 84.5,5.5 17,6 88.5,7
BAT_SENSE_+: J2.2 R2.2 R3.2 R4.2 | length 18.1
  Top Layer w0.5: J2.2 8.275,38.75 11.4,35.625 R2.2 11.75,35.375 R3.2 19,35.375 20.025,34.35 R4.2
D2: IC2.4 J?.3 | length 25.9
  Top Layer w0.5: IC2.4 32.26,67 44.04,67 J?.3
D3: IC2.5 J?.2 | length 28.2
  Top Layer w0.5: IC2.5 30.72,68 45.58,68 J?.2
D6: IC2.8 J?.1 | length 35.6
  Top Layer w0.5: IC2.8 24.1,69 47.12,69 J?.1
D7: IC2.9 J?.16 | length 41.2
  Top Layer w0.5: IC2.9 22.212,69.652 49.008,69.652 J?.16
D11: IC2.13 J?.7 | length 51
  Top Layer w0.5: IC2.13 20.38,51.5 42.5,51.5 v3(44.85,49.15)
  Bottom Layer w0.5: v3(44.85,49.15) J?.7
GATE_D: D3.1 Q1.1 Q2.1 R13.2 | length 30.1
  Top Layer w0.5: Q1.1 55.54,28.29 55.76,28.51 55.924,28.51 61.414,34.001 61.414,36.4 D3.1@61.779,36.764 ; R13.2 61.15,37.7 61.85,37 D3.1 62.807,36.443 62.807,35.693 68.444,30.057 68.444,26.796 Q2.1
GND: C1.1 C2.1 C3.2 C4.1 IC1.1 IC2.3 IC2.28 J1.N J2.1 J3.4 J4.4 J5.4 J?.8 J?.9 Q3.2 R5.1 R6.1 R7.1 R15.1 U1.2
  other v1: 4.6,3.1 7.6,3.1 10.6,3.1 13.6,3.1 91.6,3.1 3.1,6.1 6.1,6.1 9.1,6.1 12.1,6.1 96.1,6.1 1.6,9.1 4.6,9.1 7.6,9.1 13.6,9.1 25.6,9.1 28.6,9.1 31.6,9.1 34.6,9.1 37.6,9.1 40.6,9.1 43.6,9.1 46.6,9.1 79.6,9.1 82.6,9.1 94.6,9.1 3.1,12.1 6.1,12.1 9.1,12.1 12.1,12.1 24.1,12.1 81.1,12.1 84.1,12.1 96.1,12.1 1.6,15.1 4.6,15.1 7.6,15.1 10.6,15.1 13.6,15.1 82.6,15.1 85.6,15.1 94.6,15.1 3.1,18.1 6.1,18.1 9.1,18.1 12.1,18.1 15.1,18.1 18.1,18.1 21.1,18.1 75.1,18.1 78.1,18.1 81.1,18.1 84.1,18.1 96.1,18.1 1.6,21.1 4.6,21.1 7.6,21.1 10.6,21.1 73.6,21.1 94.6,21.1 3.1,24.1 6.1,24.1 9.1,24.1 12.1,24.1 66.1,24.1 69.1,24.1 72.1,24.1 93.1,24.1 96.1,24.1 1.6,27.1 4.6,27.1 7.6,27.1 10.6,27.1 34.6,27.1 70.6,27.1 91.6,27.1 94.6,27.1 3.1,30.1 6.1,30.1 9.1,30.1 12.1,30.1 33.1,30.1 36.1,30.1 66.1,30.1 72.1,30.1 75.1,30.1 78.1,30.1 81.1,30.1 84.1,30.1 87.1,30.1 90.1,30.1 93.1,30.1 96.1,30.1 1.6,33.1 4.6,33.1 7.6,33.1 10.6,33.1 13.6,33.1 16.6,33.1 19.6,33.1 22.6,33.1 25.6,33.1 28.6,33.1 31.6,33.1 34.6,33.1 37.6,33.1 67.6,33.1 70.6,33.1 73.6,33.1 76.6,33.1 79.6,33.1 82.6,33.1 85.6,33.1 88.6,33.1 91.6,33.1 94.6,33.1 6.1,36.1 9.1,36.1 24.1,36.1 27.1,36.1 30.1,36.1 39.1,36.1 66.1,36.1 69.1,36.1 72.1,36.1 75.1,36.1 81.1,36.1 87.1,36.1 90.1,36.1 93.1,36.1 96.1,36.1 1.6,39.1 10.6,39.1 13.6,39.1 16.6,39.1 22.6,39.1 25.6,39.1 28.6,39.1 34.6,39.1 76.6,39.1 88.6,39.1 91.6,39.1 94.6,39.1 3.1,42.1 6.1,42.1 9.1,42.1 24.1,42.1 27.1,42.1 48.1,42.1 51.1,42.1 57.1,42.1 69.1,42.1 72.1,42.1 78.1,42.1 87.1,42.1 90.1,42.1 93.1,42.1 96.1,42.1 1.6,45.1 4.6,45.1 7.6,45.1 10.6,45.1 13.6,45.1 16.6,45.1 25.6,45.1 28.6,45.1 34.6,45.1 40.6,45.1 43.6,45.1 58.6,45.1 61.6,45.1 67.6,45.1 70.6,45.1 73.6,45.1 85.6,45.1 88.6,45.1 91.6,45.1 3.1,48.1 6.1,48.1 9.1,48.1 12.1,48.1 15.1,48.1 30.1,48.1 36.1,48.1 42.1,48.1 45.1,48.1 48.1,48.1 60.1,48.1 63.1,48.1 66.1,48.1 69.1,48.1 72.1,48.1 84.1,48.1 87.1,48.1 90.1,48.1 93.1,48.1 96.1,48.1 1.6,51.1 4.6,51.1 7.6,51.1 19.6,51.1 58.6,51.1 61.6,51.1 64.6,51.1 67.6,51.1 70.6,51.1 73.6,51.1 76.6,51.1 79.6,51.1 85.6,51.1 88.6,51.1 91.6,51.1 94.6,51.1 6.1,54.1 9.1,54.1 21.1,54.1 27.1,54.1 30.1,54.1 33.1,54.1 36.1,54.1 39.1,54.1 60.1,54.1 63.1,54.1 66.1,54.1 69.1,54.1 72.1,54.1 75.1,54.1 78.1,54.1 81.1,54.1 87.1,54.1 90.1,54.1 93.1,54.1 96.1,54.1 1.6,57.1 4.6,57.1 7.6,57.1 10.6,57.1 13.6,57.1 46.6,57.1 49.6,57.1 58.6,57.1 61.6,57.1 64.6,57.1 91.6,57.1 94.6,57.1 6.1,60.1 9.1,60.1 15.1,60.1 72.1,60.1 75.1,60.1 81.1,60.1 84.1,60.1 93.1,60.1 96.1,60.1 1.6,63.1 4.6,63.1 7.6,63.1 10.6,63.1 13.6,63.1 16.6,63.1 19.6,63.1 22.6,63.1 52.6,63.1 70.6,63.1 73.6,63.1 76.6,63.1 82.6,63.1 85.6,63.1 91.6,63.1 94.6,63.1 3.1,66.1 9.1,66.1 24.1,66.1 27.1,66.1 30.1,66.1 33.1,66.1 36.1,66.1 39.1,66.1 42.1,66.1 54.1,66.1 72.1,66.1 75.1,66.1 81.1,66.1 84.1,66.1 93.1,66.1 96.1,66.1 4.6,69.1 10.6,69.1 91.6,69.1
I_SENSE: C3.1 IC2.25 R8.2 R11.2 | length 18.1
  Top Layer w0.5: R8.2 28.092,40.3 29.442,41.65 R11.2 ; IC2.25 31.75,47.75 R11.2 ; C3.1 34.487,41.662 31.762,41.662 R11.2
IP+: J6.P U1.4 U1.4_1 U1.4_2 U1.4_3 U1.4_4 U1.4_5 U1.4_6 U1.4_7 U1.4_8 U1.4_9 U1.4_10 U1.4_11 U1.4_12 U1.4_13 U1.4_14 U1.4_15 U1.4_16
  other v2: 26.5,20 25,21.5 26.5,23.5 24.5,25.5 26.5,27 24.5,29
IP-: D3.2 Q1.2 Q2.2 R12.2 U1.5 U1.5_1 U1.5_2 U1.5_3 U1.5_4 U1.5_5 U1.5_6 U1.5_7 U1.5_8 U1.5_9 U1.5_10 U1.5_11 U1.5_12 U1.5_13 U1.5_14 U1.5_15 U1.5_16
  other v2: 44,20.5 60,23.5 43.5,24.5 46.5,26.5 61,26.5 43.5,28.5 60,29 45.5,30.5 62.5,30.5
LOAD+: J7.P Q1.3 Q2.3
  other v2: 49.5,9.5 69,9.5 56.5,10 65.5,10 53,11 60,11.5 70.5,11.5 50.5,12 63.5,12 66.5,14.5 50.5,15.5 54.5,15.5 64.5,16.5 68.5,16.5 50.5,17.5 53,17.5 56,17.5 68,19 52.5,19.5 64,19.5 50,20 56,20 66,20.5
NetQ3_1: Q3.1 R14.1 R15.2 | length 4.9
  Top Layer w0.5: R14.1 R15.2 65.975,44.1 65.975,41.775 Q3.1
NetQ3_3: Q3.3 R12.1 R13.1 | length 14.1
  Top Layer w0.5: R12.1@54.25,39.85 54,39.6 R12.1 57.425,39.6 58.35,40.525 R13.1 58.35,40.975 58.7,41.325 58.925,41.325 59.6,42 61.894,42 62.996,40.898 63.902,40.898 65,39.8 Q3.3
NetR8_1: IC2.20 R8.1 | length 12.3
  Top Layer w0.5: v3(25,44.5) 25,44.473 25.5,43.973 R8.1
  Bottom Layer w0.5: IC2.20 22.3,44.5 v3(25,44.5)
NetR9_2: IC2.6 R9.2 | length 36
  Top Layer w0.5: IC2.6 26.711,62.949 34.551,62.949 47,50.5 R9.2
NetR11_1: R11.1 U1.3 | length 3.8
  Top Layer w0.5: R11.1 31.75,38.47 U1.3
REF: IC2.17 J?.12 | length 76.2
  Bottom Layer w0.5: IC2.17 20.18,60 39,60 49.5,70.5 57.5,70.5 60,68 60,59.96 J?.12
RESET: IC2.2 J?.6 | length 22.1
  Top Layer w0.5: IC2.2 48.13,51.69 J?.6
RXD: IC2.1 J?.5 | length 18.5
  Top Layer w0.5: IC2.1 48.13,54.23 J?.5
thermoCLK: IC2.15 J3.3 J4.3 J5.3 | length 106.9
  Top Layer w0.5: IC2.15 3.436,50.664 3.436,65.222 11.128,72.914 60.086,72.914 68.5,64.5 J5.3 J4.3 J3.3
thermoCS1: IC2.11 J4.1 | length 74.7
  Top Layer w0.5: IC2.11 18.437,70.957 55.043,70.957 67.777,58.223 76.723,58.223 78,59.5 J4.1
thermoCS2: IC2.10 J3.1 | length 81.6
  Top Layer w0.5: IC2.10 20.325,70.305 53.838,70.305 67.143,57 84.625,57 87.125,59.5 J3.1
thermoCS3: IC2.12 J5.1 | length 67.2
  Top Layer w0.5: IC2.12 16.55,71.61 56.515,71.61 68.625,59.5 J5.1
thermoMISO: IC2.14 J3.2 J4.2 J5.2 | length 90.3
  Top Layer w0.5: IC2.14 12.122,72.262 58.363,72.262 68.625,62 J5.2 J4.2 J3.2
TXD: IC2.0 J?.4 | length 14.9
  Top Layer w0.5: IC2.0 43.76,64.74 J?.4
pads on no net: D1.3 IC2.27 J1.S1 J1.S2 J6.S1 J6.S2 J7.S1 J7.S2

## Polygon pours and split planes (outlines as drawn)
GND on Top Layer "GND_L01_P000" (solid, pour order 0): 0,73.5 97,73.5 97,0 0,0
GND on Bottom Layer "GND_L02_P001" (solid, pour order 1): 0,73.5 97,73.5 97,0 0,0

## Other copper
Top Layer:
  region net BAT-: 73.5,26.5 73.5,22 75,20.5 83,20.5 87.5,16 87.5,9 86,7.5 24.5,7.5 23,9 23,15.5 21,17.5 17,17.5 14.5,15 14.5,4 18.5,0 87.5,0 93.5,6 93.5,22.5 88.5,27.5 74.5,27.5
  region net IP+: 14.027,21.251 16.027,19.251 22.027,19.251 24.027,17.251 24.027,13.251 26.027,11.251 33.027,11.251 34.777,13.001 34.777,25.501 30.027,30.251 16.027,30.251 14.027,28.251
  region net LOAD+: 46.875,20.375 47.875,21.375 71.875,21.375 72.875,20.375 72.875,17.875 73.875,16.875 78.875,16.875 79.875,15.875 79.875,10.375 77.875,8.375 48.125,8.375 46.875,9.625
  region net IP-: 35.5,12.5 36.5,11.5 44.5,11.5 45.5,12.5 45.5,20.5 47,22 63,22 65.5,24.5 65.5,30 64,31.5 61,31.5 59,29.5 59,25 58,24 52.5,24 51.5,25 51.5,29.5 56.5,34.5 59.5,34.5 60,35 60,38 59.5,38.5 45.5,38.5 35.5,28.5
Bottom Layer:
  region net BAT-: 73.5,26.5 73.5,22 75,20.5 83,20.5 87.5,16 87.5,9 85.5,7 25,7 23,9 23,15.5 21,17.5 17,17.5 14.5,15 14.5,4 18.5,0 87.5,0 93.5,6 93.5,22.5 88.5,27.5 74.5,27.5
  region net BAT-: 73.5,26.5 73.5,22 75,20.5 83,20.5 87.5,16 87.5,9 85.5,7 25,7 23,9 23,15.5 21,17.5 17,17.5 14.5,15 14.5,4 16.5,2 89.5,2 93.5,6 93.5,22.5 88.5,27.5 74.5,27.5
  region net IP+: 14,21.5 16,19.5 22,19.5 24,17.5 24,13.5 26,11.5 33,11.5 34.75,13.25 34.75,25.75 30,30.5 16,30.5 14,28.5
  region net LOAD+: 46.875,20.5 47.875,21.5 71.875,21.5 72.875,20.5 72.875,18 73.875,17 78.875,17 79.875,16 79.875,10.5 77.875,8.5 48.125,8.5 46.875,9.75
  region net IP-: 35.5,28.5 35.5,12.5 36.5,11.5 44.5,11.5 45.5,12.5 45.5,20.5 47,22 63,22 65.5,24.5 65.5,30.5 63,33 62,33 40,33

## Silkscreen, mask and mechanical layers (free items; w line width, h text height)
Top Overlay:
  lines w0.254: 24.5,39.5 26.5,39.5 26.5,43 24.5,43 24.5,39.5 ; 40.5,40 42.5,40 42.5,43 40.5,43 40.5,40 ; 46,39.5 48,39.5 48,43 46,43 46,39.5
  text "5V" at 65,69.509 h1.2
  text "5V" at 74.5,69.509 h1.2
  text "5V" at 83.5,69.509 h1.2
  text "GND" at 64.5,67.009 h1.2
  text "GND" at 74,67.009 h1.2
  text "GND" at 83,67.009 h1.2
  text "CLK" at 64.5,64.508 h1.2
  text "CLK" at 74,64.508 h1.2
  text "CLK" at 83,64.508 h1.2
  text "D6" at 49,64.009 h1.2
  text "D7" at 56,64.003 h1.2
  text "MISO" at 64,62.009 h1.2
  text "MISO" at 73.5,62.009 h1.2
  text "MISO" at 82.5,62.009 h1.2
  text "D3" at 49,61.509 h1.2
  text "A4" at 56,61.503 h1.2
  text "CS3" at 64.5,59.509 h1.2
  text "CS1" at 74,59.509 h1.2
  text "CS2" at 83,59.509 h1.2
  text "D2" at 49,59 h1.2
  text "A6" at 56,59.009 h1.2
  text "TXD" at 48.5,56.503 h1.2
  text "A7" at 56,56.503 h1.2
  text "RXD" at 48.5,54.003 h1.2
  text "REF" at 56,54.003 h1.2
  text "RESET" at 47.5,51.509 h1.2
  text "3.3V" at 56,51.509 h1.2
  text "D11" at 48.5,49 h1.2
  text "5V" at 56,49.009 h1.2
  text "6-12 VOLT" at 89.5,47.009 h1.2
  text "GND" at 48.25,46.509 h1.2
  text "GND" at 56,46.509 h1.2
  text "JP1" at 43.491,41 h1.2 r90
  text "JP3" at 27.315,40.798 h1.2 r90
  text "JP2" at 48.815,40.798 h1.2 r90
  text "BAT+" at 8,38.503 h1.2
  text "GND" at 8,36.009 h1.2
  text "BAT_IN" at 1.5,30.543 h2
  text "LOAD" at 90.75,30.265 h2
Bottom Overlay:
  lines w0.254: 61.75,54 65.75,54 65.75,56 61.75,56 61.75,54 ; 63.75,51.5 71.75,51.5 71.75,53.5 63.75,53.5 63.75,51.5 ; 64,48.75 72,48.75 72,50.75 64,50.75 64,48.75
  text "JP1 - External Vin /   USB" at 78.75,54.474 h2
  text "JP2 - D5 /   D5 and D4" at 78.75,51.974 h2
  text "JP3 - A3 /   A3 and A5" at 78.75,49.224 h2
Board Shape:
  lines w0.5: 0,0 24.25,0 72.75,0 97,0 97,73.5 0,73.5 0,0